# Altium PCB g1.PcbDoc (part 1 of 2)
Units mm, origin at the board's own origin, x right, y up, seen from the top; angles counter-clockwise.
Board outline 80 x 50 mm, 4 copper layers (Top Layer, Int1 (GND), Int2 (GND), Bottom Layer), stack 1.57 mm thick; 65 components, 42 nets, 263 pads, 236 vias.
Unrouted connection lines stored in the file: 74.
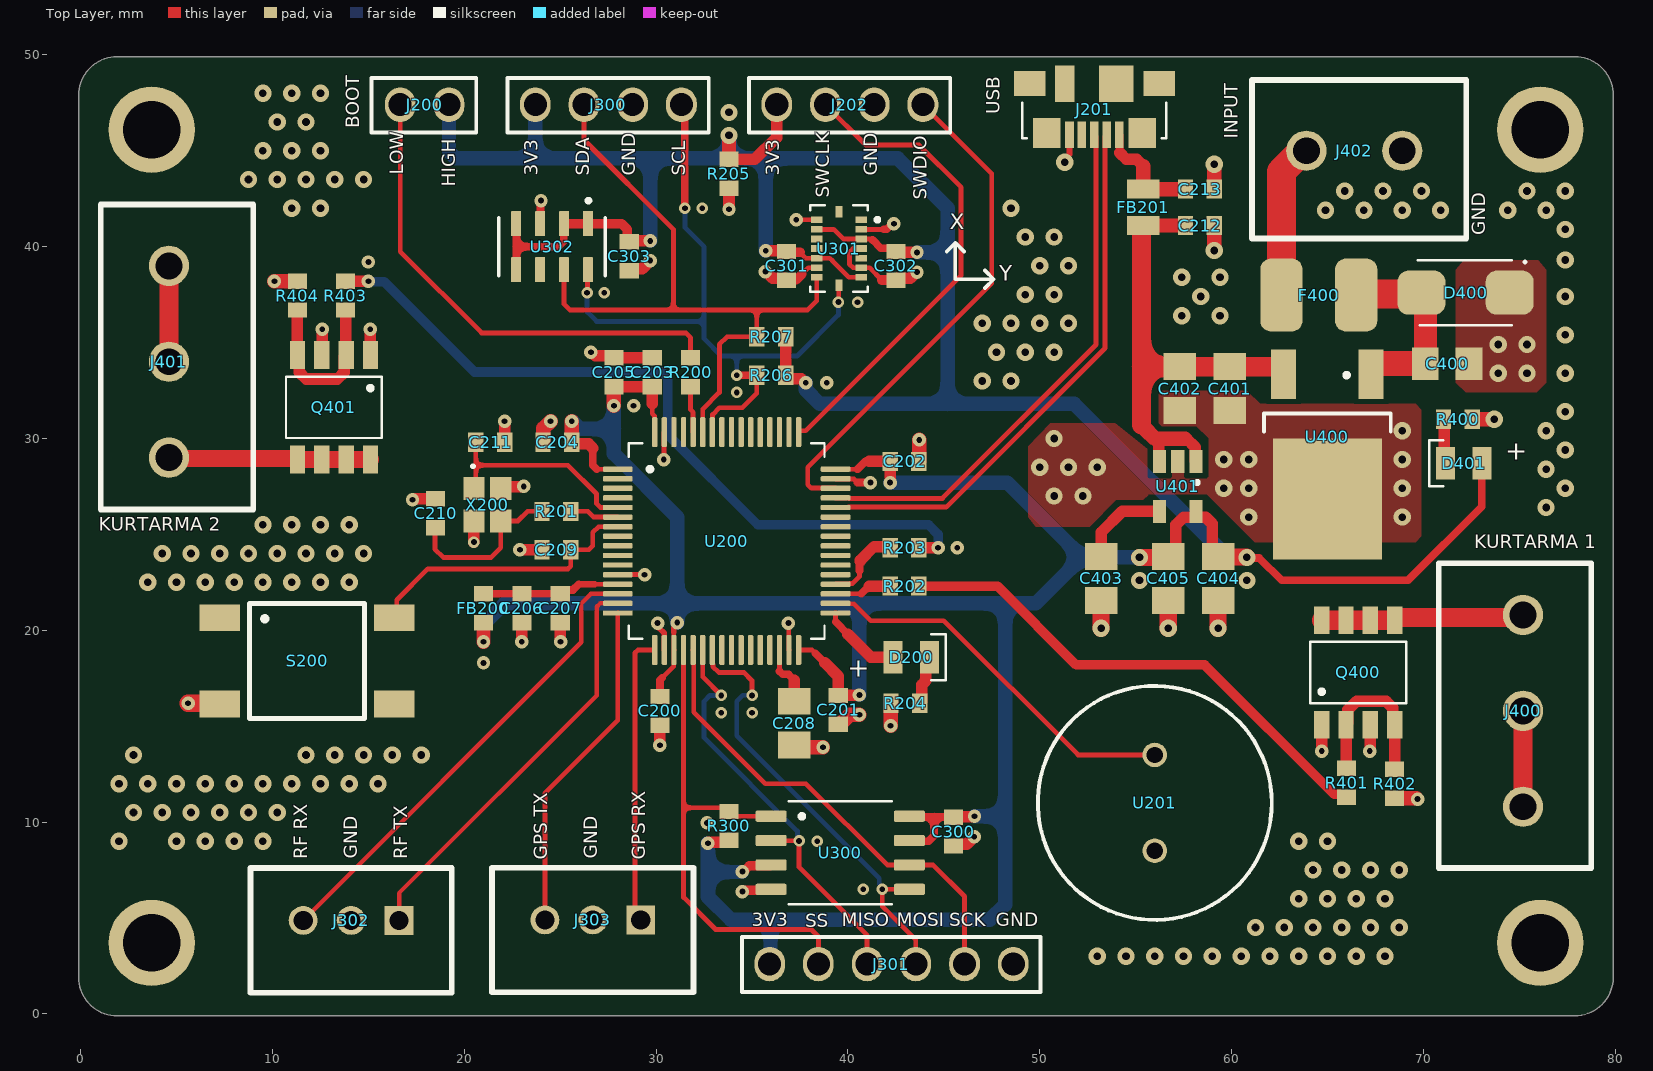
[diagram p0: Top Layer view]
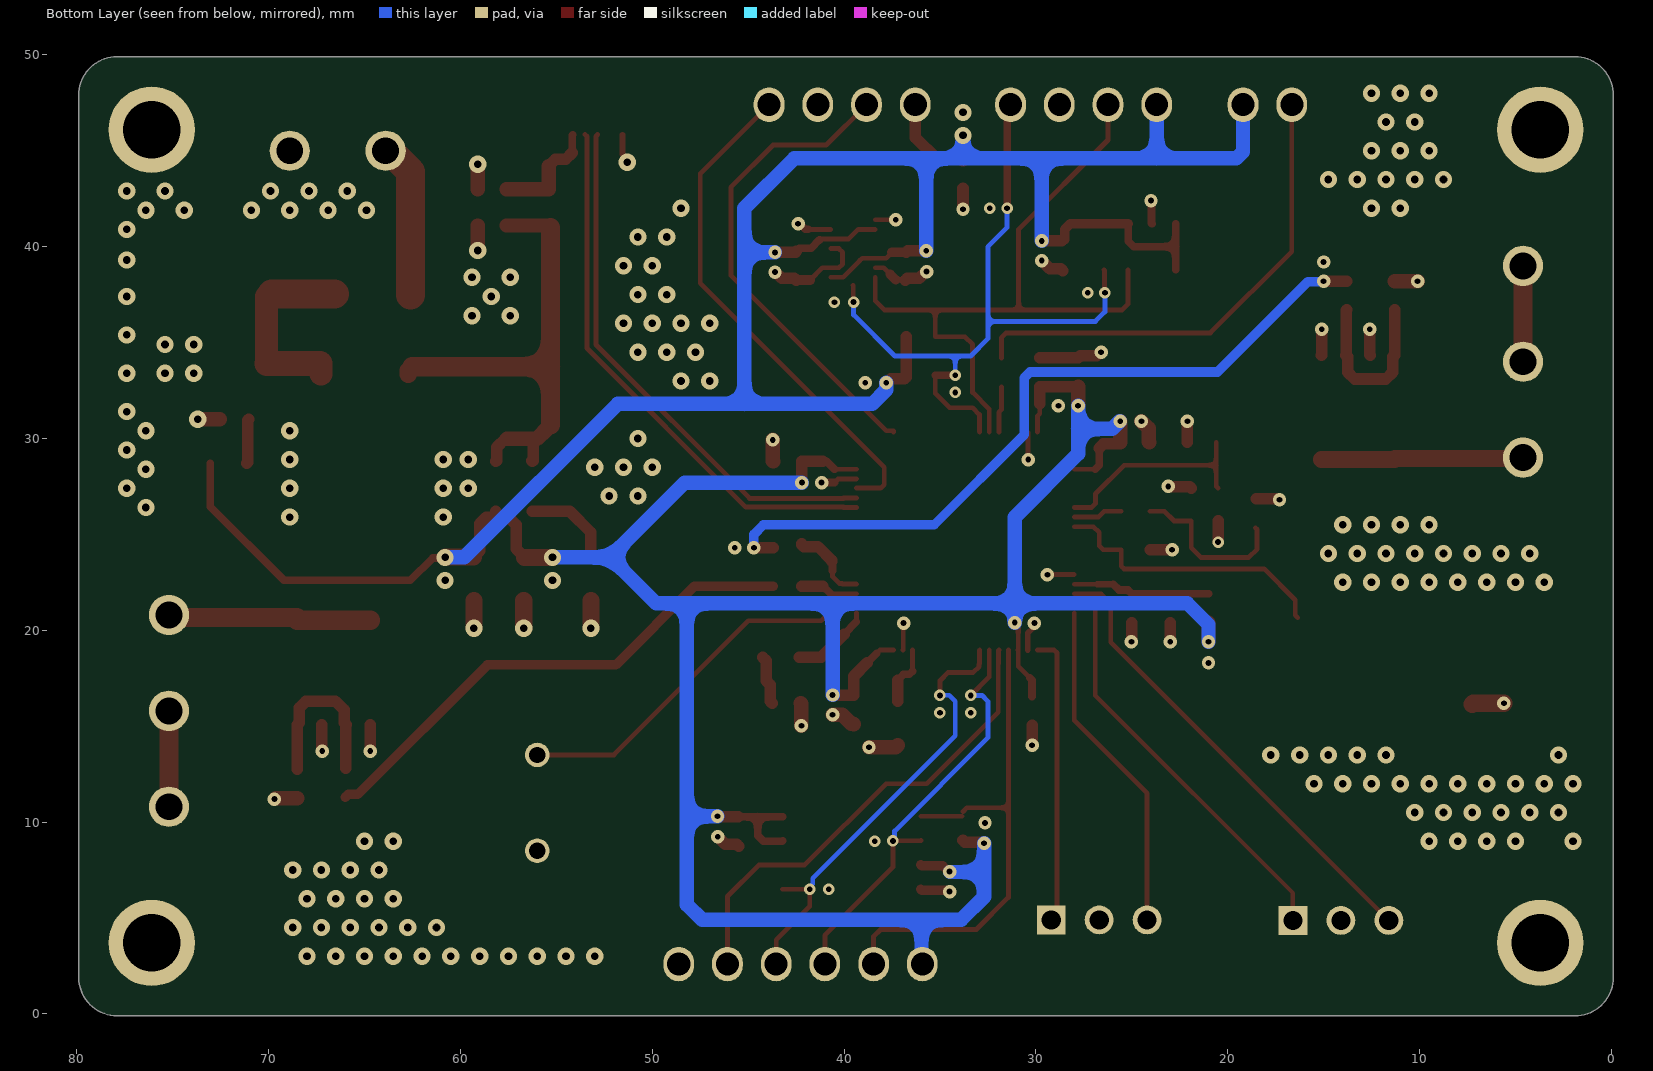
[diagram p1: Bottom Layer view, seen from below]
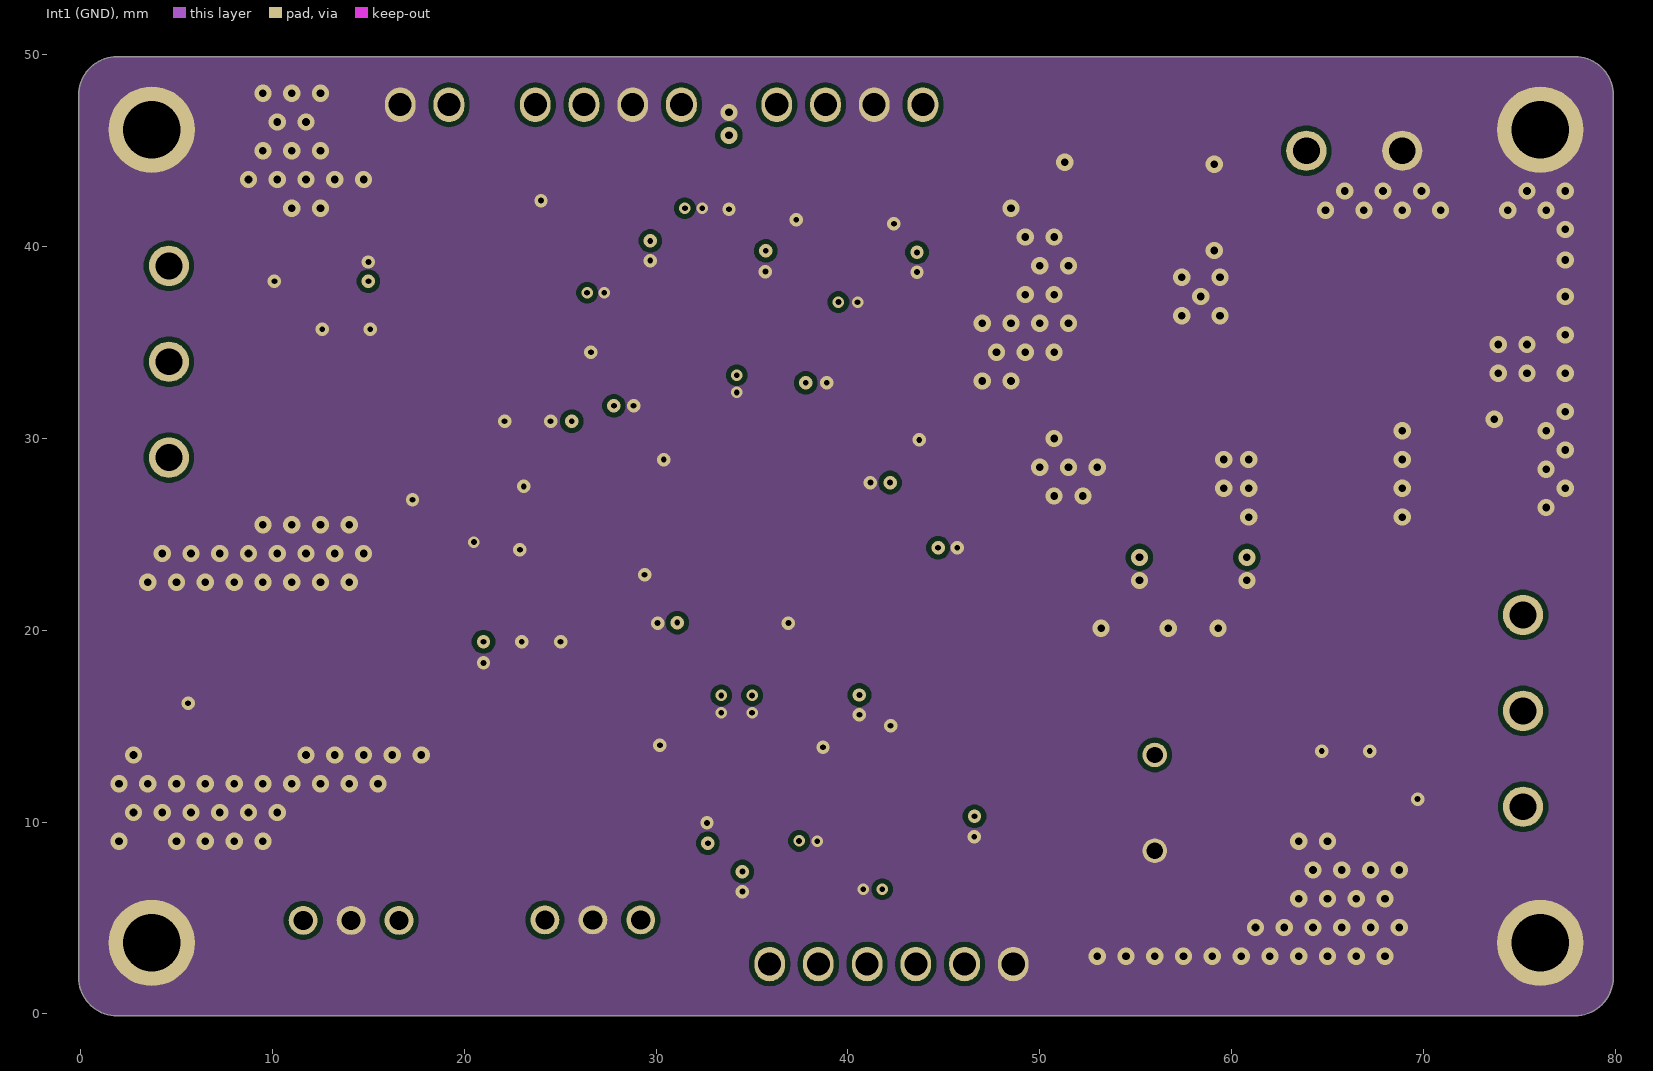
[diagram p2: Int1 (GND)]
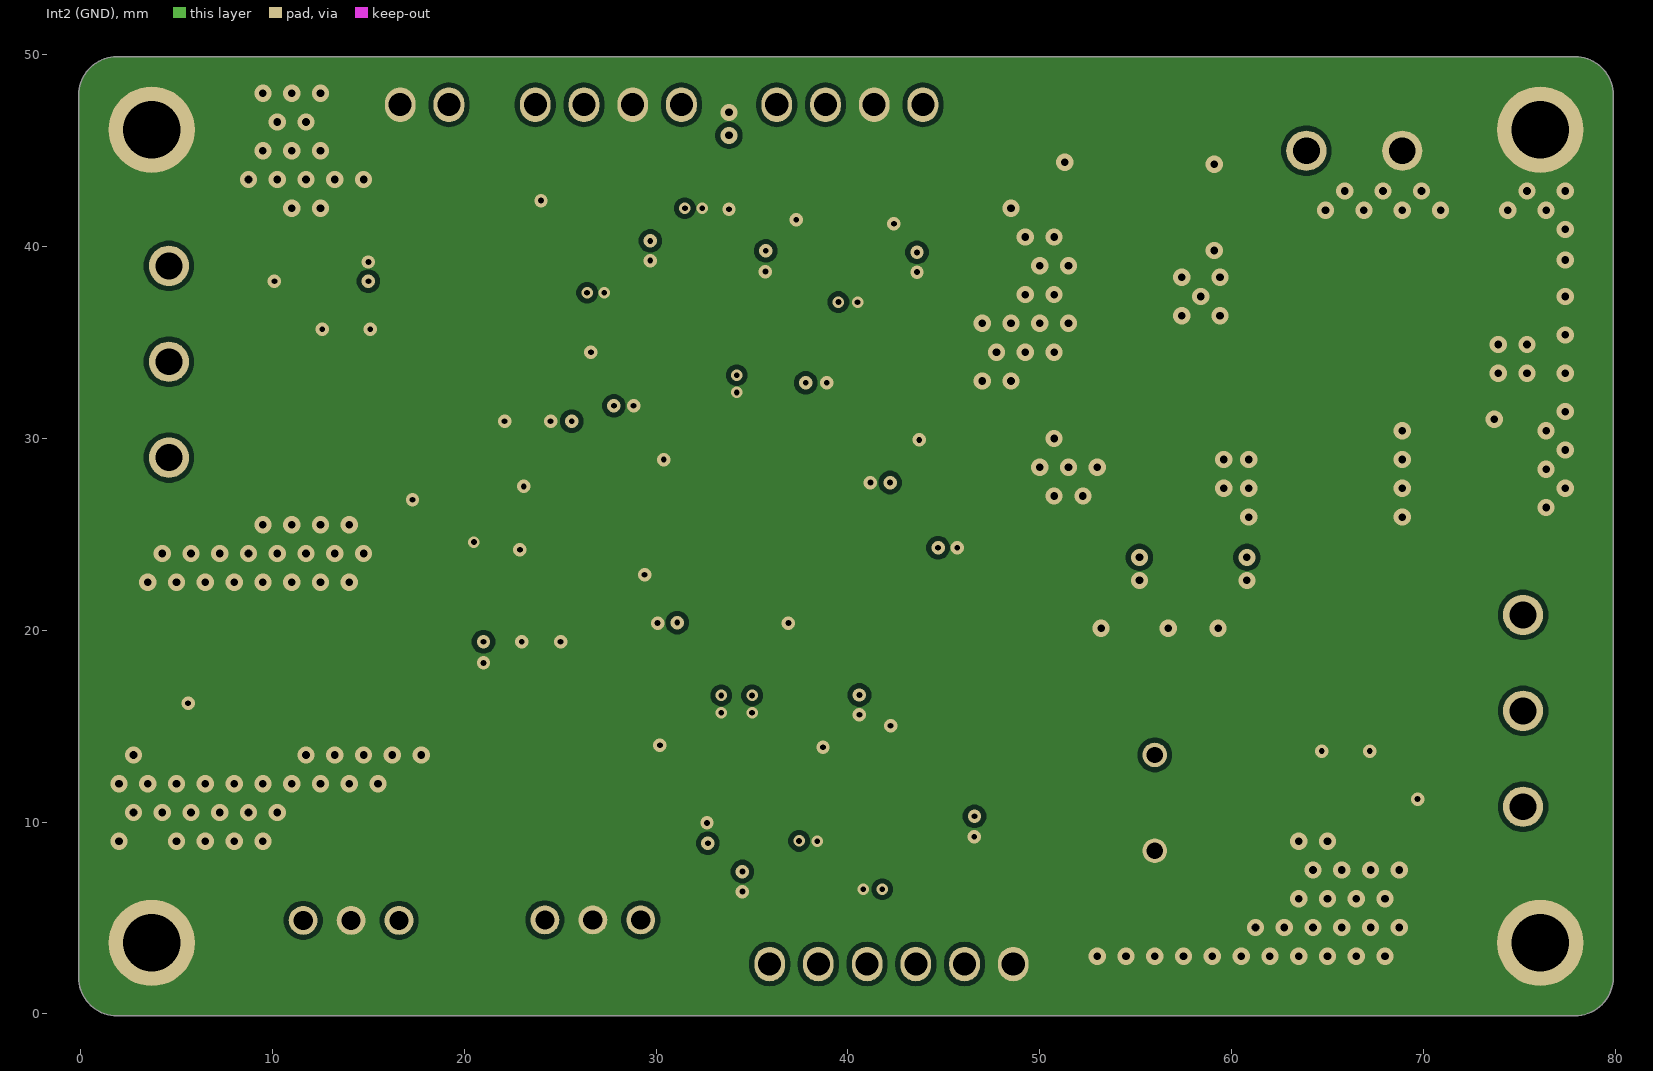
[diagram p3: Int2 (GND)]
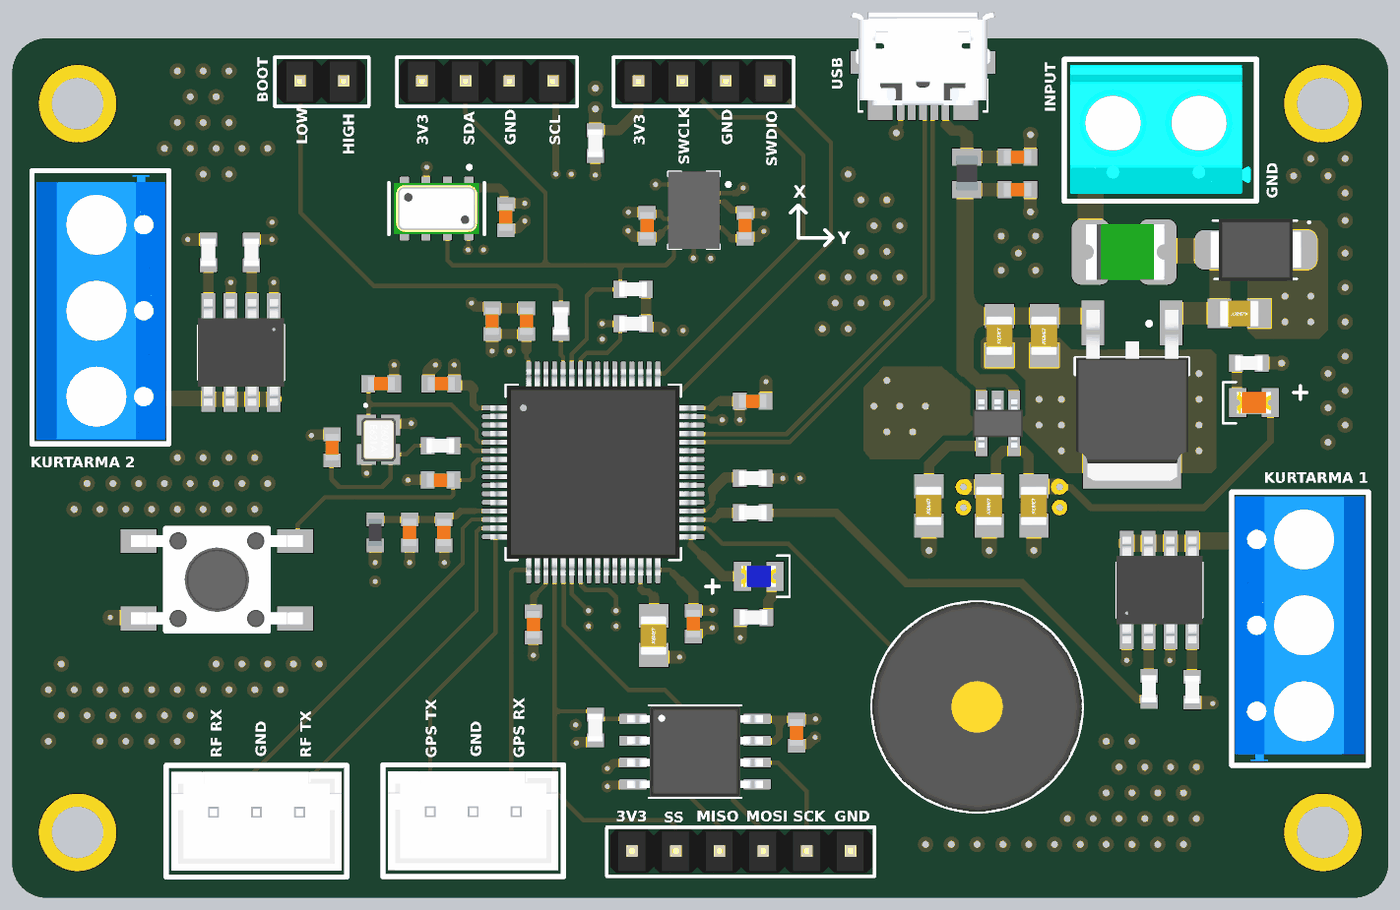
[diagram p4: 3D render of the assembled board from above, using the file's embedded part models]

## Layer stack, top to bottom
Top Solder: solder mask 0.0254, SM-001, Dk 4
Top Layer: signal copper 0.035
Dielectric 1: prepreg 0.2, PP-017, Dk 4.6
Int1 (GND): signal copper 0.0175
Dielectric 3: core 1.065, Core-039, Dk 4.6
Int2 (GND): signal copper 0.0175
Dielectric 5: prepreg 0.2, PP-017, Dk 4.6
Bottom Layer: signal copper 0.035
Bottom Solder: solder mask 0.0254, SM-001, Dk 4

## Board outline
-0.1,1.9 ccw(c1.9,1.9) 1.9,-0.1 77.9,-0.1 ccw(c77.9,1.9) 79.9,1.9 79.9,47.9 ccw(c77.9,47.9) 77.9,49.9 1.9,49.9 ccw(c1.9,47.9) -0.1,47.9

## Design rules (kind name [scope] priority, off if disabled: settings)
Clearance [All] p1: gap=0.254 ignorepadtopadclearanceinfootprint=FALSE except(0.1: SMDPad-SMDPad; 0.2: Arc-Arc Arc-Track Arc-SMDPad Arc-Hole Track-Track Track-SMDPad Track-Hole SMDPad-THPad SMDPad-Hole THPad-Hole Via-Hole Fill-Hole Poly-Hole Region-Hole Text-Hole; 0.3: Arc-Via Track-Via Via-Via; 0.33: Arc-THPad Track-THPad; 0.5: THPad-THPad)
DiffPairsRouting [All] p1: maxlimit=0.254 minlimit=0.203 mostfreqgap=0.254 toplayer_maxgap=0.203 toplayer_prefgap=0.203 toplayer_minwidth=0.26 toplayer_maxwidth=0.26 toplayer_prefwidth=0.26 midlayer1_minwidth=0.381 midlayer1_maxwidth=0.381 midlayer1_prefwidth=0.381 midlayer2_minwidth=0.381 midlayer2_maxwidth=0.381 midlayer2_prefwidth=0.381 bottomlayer_maxgap=0.203 bottomlayer_prefgap=0.203 bottomlayer_minwidth=0.26 bottomlayer_maxwidth=0.26 bottomlayer_prefwidth=0.26 maxuncoupledlength=12.7
HoleSize [All] p1: absolutevalues=TRUE maxlimit=6 minlimit=0.3 maxpercent=80.000 minpercent=20.000
HoleToHoleClearance [All] p1: gap=0.5 allowstackedmicrovias=TRUE
MinimumSolderMaskSliver [All] p1: minsoldermaskwidth=0.005
PlaneConnect [All] p1: planeconnectstyle=Direct reliefexpansion=0.508 reliefentries=4 reliefconductorwidth=0.254 reliefairgap=0.254
PolygonConnect [All] p1: connectstyle=Direct reliefconductorwidth=0.5 reliefentries=4 polygonreliefangle="90 Angle" airgapwidth=0
RoutingVias [All] p1: holewidth=0.3 width=0.7 viastyle="Through Hole" minholewidth=0.3 minwidth=0.5 maxholewidth=0.7 maxwidth=0.9
SilkToSilkClearance [All] p1: silktosilkclearance=0.2
SolderMaskExpansion [All] p1: expansion=0.05 istentingtop=FALSE
UnRoutedNet [All] p1: checkbadconnections=TRUE
Width [All] p1: maxlimit=1.5 minlimit=0.2 preferedwidth=0.3 minimp=50.000000 maximp=50.000000 favimp=50.000000
23 further rules are at their usual default settings.

## Classes and differential pairs
differential pair class DIFF_USB: USB_D
component class Power: C400 C401 C402 C403 C404 C405 D400 D401 F400 J400 J401 J402 Q400 Q401 R400 R401 R402 R403 R404 U400 U401
component class Peripheral: C300 C301 C302 C303 J300 J301 J302 J303 R300 U300 U301 U302
component class MCU: C200 C201 C202 C203 C204 C205 C206 C207 C208 C209 C210 C211 C212 C213 D200 FB200 FB201 J200 J201 J202 R5 R200 R201 R202 R203 R204 R205 R206 R207 S200 U200 U201 X200
differential pair USB_D: +USB_D_P -USB_D_N

## Components (designator, comment, footprint, x,y, rotation, side; value= is the part's Value field where it differs from the comment)
C200 "100n" "CAP 0603" 30.2,15.8 r90 top
C201 "100n" "CAP 0603" 39.5,15.85 r90 top
C202 "100n" "CAP 0603" 42.95,28.8 r180 top
C203 "100n" "CAP 0603" 29.8,33.45 r270 top
C204 "1u" "CAP 0603" 24.85,29.8 r0 top
C205 "2u2" "CAP 0603" 27.8,33.45 r270 top
C206 "100n" "CAP 0603" 23,21.15 r90 top
C207 "1u" "CAP 0603" 25,21.15 r90 top
C208 "4u7" "CAP 0805" 37.2,15.157 r90 top
C209 "100n" "CAP 0603" 24.8,24.2 r0 top
C210 "8p" "CAP 0603" 18.5,26.1 r270 top
C211 "8p" "CAP 0603" 21.35,29.8 r180 top
C212 "2u2" "CAP 0603" 58.35,41.1 r0 top
C213 "2u2" "CAP 0603" 58.35,43 r0 top
C300 "100n" "CAP 0603" 45.5,9.5 r270 top
C301 "100n" "CAP 0603" 36.8,39 r90 top
C302 "100n" "CAP 0603" 42.5,39 r90 top
C303 "100n" "CAP 0603" 28.6,39.5 r90 top
C400 "0u33" "CAP 0805" 71.243,33.9 r180 top
C401 "100n" "CAP 0805" 59.9,32.6 r90 top
C402 "100n" "CAP 0805" 57.3,32.6 r90 top
C403 "470p" "CAP 0805" 53.2,22.7 r90 top
C404 "4u7" "CAP 0805" 59.3,22.7 r90 top
C405 "100n" "CAP 0805" 56.7,22.7 r90 top
D200 "LED 0805 BLUE" "LED 0805 BLUE" 43.3,18.6 r180 top
D400 "SMBJ12CA-13-F" SMBJ12CA-13-F 72.2,37.6 r0 top
D401 "LED 0805 RED" "LED 0805 RED" 72.1,28.7 r0 top
F400 "0ZCG0075FF2C" 0ZCG0075FF2C 64.6,37.6 r0 top
FB200 "600 Ω @ 100 MHz" "FB 0603" 21,21.15 r90 top
FB201 "100R" "FB 0805" 55.4,42.05 r90 top
J200 "1x2 HEADER" "1x2 HEADER MALE" 16.66,47.4 r180 top
J201 "47346-0001" MOLEX_47346-0001 52.85,48.5 r180 top
J202 "1x4 HEADER MALE" "1X4 HEADER MALE" 40.1,47.4 r180 top
J300 "1x4 HEADER MALE" "1X4 HEADER MALE" 27.51,47.4 r180 top
J301 "1x6 HEADER MALE" "1X6 HEADER MALE" 42.27,2.6 r180 top
J302 "JST B3B-XH-A" JST_B3B-XH-A 14.1,4.35 r180 top
J303 "JST B3B-XH-A" JST_B3B-XH-A 26.7,4.375 r180 top
J400 "KF301 3P Terminal" "KF301 3P" 75.2,15.8 r270 top
J401 "KF301 3P Terminal" "KF301 3P" 4.6,34 r90 top
J402 "KF301 2P Terminal" "KF301 2P" 66.4,45 r0 top
Q400 "DMG4822SSD-13" DMG4822SSD-13 66.6,17.8 r90 top
Q401 "DMG4822SSD-13" DMG4822SSD-13 13.205,31.625 r270 top
R200 "10K" "RES 0603" 31.8,33.45 r270 top
R201 "0R" "RES 0603" 24.8,26.2 r0 top
R202 "1K" "RES 0603" 42.95,22.3 r180 top
R203 "1K" "RES 0603" 42.95,24.3 r0 top
R204 "1K" "RES 0603" 43,16.2 r180 top
R205 "10K" "RES 0603" 33.8,43.8 r90 top
R206 "10K" "RES 0603" 36,33.3 r0 top
R207 "10K" "RES 0603" 36,35.3 r0 top
R300 "10K" "RES 0603" 33.8,9.8 r270 top
R400 "1K" "RES 0603" 71.8,31 r0 top
R401 "1K" "RES 0603" 66,12.05 r90 top
R402 "10K" "RES 0603" 68.5,12 r90 top
R403 "1K" "RES 0603" 13.8,37.45 r270 top
R404 "10K" "RES 0603" 11.3,37.45 r270 top
S200 "FSM4JSMATR" FSM4JSMATR 11.8,18.4 r90 top
U200 "STM32F446RET6" STM32F446RET6 33.68,24.65 r0 top
U201 "PS1240P02BT" PS1240P02BT 56,11 r90 top
U300 "W25Q64JVSSIQ" W25Q64JVSSIQ 39.6,8.4 r0 top
U301 "BMI088" BMI088 39.535,39.9 r270 top
U302 "MS560702BA03-50" MS5607-02BA3 24.575,40 r270 top
U400 "L78M05CDT-TR" L78M05CDT-TR 65,29.2 r270 top
U401 "MIC5205-3.3YM5-TR" MIC5205-3.3YM5-TR 57.2,27.5 r180 top
X200 "FA-20H 16.0000MF10Z-AJ0" "FA-20H 16.0000MF10Z-AJ0" 21.3,26.55 r270 top

## Footprints (in the part's own frame and the unit in brackets; to place one, negate y for a bottom-side part, rotate by r counter-clockwise, add the part's x,y. Pads: shape width x height; smd on the part's side, far side on the other; paste and mask are expansions set on the pad)
0ZCG0075FF2C [mm] "PTC"
  rrect50% 2.2x3.8 smd: 1(-2,-0.125) 2(1.9,-0.125)
  body extent -2.26,-1.75 2.29,1.49, height 0.7
"1x2 HEADER MALE" [mm]
  oval 1.6x1.8 hole 1.2: 1(-2.54,0) 2(0,0)
  silkscreen extent -3.97,-1.4 1.5,1.45, body extent -3.76,-1.27 1.32,1.27, height 9.2
"1X4 HEADER MALE" [mm]
  oval 1.6x1.8 hole 1.2: 1(-3.81,0) 2(-1.27,0) 3(1.27,0) 4(3.81,0)
  silkscreen extent -5.23,-1.4 5.25,1.45, body extent -5.08,-1.27 5.08,1.27, height 9.2
"1X6 HEADER MALE" [mm]
  oval 1.6x1.8 hole 1.2: 1(-6.35,0) 2(-3.81,0) 3(-1.27,0) 4(1.27,0) 5(3.81,0) 6(6.35,0)
  silkscreen extent -7.77,-1.4 7.8,1.45, body extent -7.62,-1.27 7.62,1.27, height 9.2
BMI088 [mm]
  rect 0.35x0.59 smd: 1(-1.5,1.165) 2(-1,1.165) 3(-0.5,1.165) 4(0,1.165) 5(0.5,1.165) 6(1,1.165) 7(1.5,1.165) 9(1.5,-1.165) 10(1,-1.165) 11(0.5,-1.165) 12(0,-1.165) 13(-0.5,-1.165) 14(-1,-1.165) 15(-1.5,-1.165)
  rect 0.59x0.35 smd: 8(1.915,0) 16(-1.915,0)
  silkscreen extent -2.25,-1.5 2.25,2.1, body extent -2.25,-1.5 2.25,1.5, height 1.55
"CAP 0603" [mm]
  rect 0.8x1 smd: 1(-0.75,0) 2(0.75,0)
  body extent -0.8,-0.4 0.8,0.4, height 0.51
"CAP 0805" [mm]
  rect 1.4x1.7 smd: 1(-1.143,0) 2(1.143,0)
  body extent -1.15,-0.76 1.15,0.79, height 1.01
DMG4822SSD-13 [mm]
  rect 1.45x0.8 smd: 1(-2.725,1.905) 2(-2.725,0.635) 3(-2.725,-0.635) 4(-2.725,-1.905) 5(2.725,-1.905) 6(2.725,-0.635) 7(2.725,0.635) 8(2.725,1.905)
  silkscreen extent -1.6,-2.5 1.6,2.5, body extent -3.1,-2.5 3.1,2.5, height 1.7
"FA-20H 16.0000MF10Z-AJ0" [mm]
  rect 1.2x1.1 smd: 1(-0.85,-0.8) 2(0.85,-0.8) 3(0.85,0.6) 4(-0.85,0.6)
  silkscreen extent -2.05,-0.9 -1.95,-0.8, body extent -1.25,-1.1 1.25,0.9, height 0.63
"FB 0603" [mm]
  rect 0.8x1 smd: 1(-0.75,0) 2(0.75,0)
  body extent -0.8,-0.4 0.8,0.4, height 0.81
"FB 0805" [mm]
  rect 1x1.7 smd: 1(-0.95,0) 2(0.95,0)
  body extent -1,-0.63 1,0.63, height 0.86
FSM4JSMATR [mm]
  rect 1.4x2.1 smd: 1(2.25,4.55) 2(2.25,-4.55) 3(-2.25,4.55) 4(-2.25,-4.55)
  silkscreen extent -3,-3 3,3, body extent -3,-5 3,5, height 5.13
JST_B3B-XH-A [mm]
  rect 1.508x1.508 / inner round 1.508 / far side rect 1.508x1.508 hole 1: 1(-2.5,-0.525)
  round 1.508 hole 1: 2(0,-0.525) 3(2.5,-0.525)
  silkscreen extent -5.25,-3.25 5.25,3.25, body extent -4.95,-2.88 4.95,2.88, height 7
"KF301 2P" [mm] "2 Pin 5mm Terminal"
  round 2.1 hole 1.4: 1(-2.5,0) 2(2.5,0)
  silkscreen extent -5.33,-4.57 5.84,3.68, body extent -5,-4.13 5.5,3.37, height 10
"KF301 3P" [mm] "3 Pin 5mm Terminal"
  round 2.1 hole 1.4: 1(-5,0) 2(0,0) 3(5,0)
  silkscreen extent -7.7,-4.4 8.2,3.56, body extent -7.45,-4.19 7.95,3.31, height 10.01
L78M05CDT-TR [mm]
  rect 2.6x1.3 smd: 1(-4.15,2.28) 3(-4.15,-2.28)
  rect 6.3x5.7 smd: 2(2.35,0)
  silkscreen extent -4.2,-3.3 -1.15,3.3, body extent -4.89,-3.25 5.04,3.29, height 2.34
"LED 0805 BLUE" [mm]
  rect 1x1.7 smd: A(0.95,0) K(-0.95,0)
  silkscreen extent -1.8,-1.2 -1.05,1.2, body extent -1,-0.63 1,0.63, height 1.12
"LED 0805 RED" [mm]
  rect 1x1.7 smd: A(0.95,0) K(-0.95,0)
  silkscreen extent -1.8,-1.2 -1.05,1.2, body extent -1,-0.63 1,0.63, height 1.12
MIC5205-3.3YM5-TR [mm]
  rect 0.69x1.2 smd: 1(-0.95,-1.3) 2(0,-1.3) 3(0.95,-1.3) 4(0.95,1.3) 5(-0.95,1.3)
  silkscreen extent -1.09,-0.29 -0.91,-0.11, body extent -1.45,-1.4 1.45,1.4, height 1.45
MOLEX_47346-0001 [mm]
  rect 0.45x1.38 smd: 1(-1.3,2.66) 2(-0.65,2.66) 3(0,2.66) 4(0.65,2.66) 5(1.3,2.66)
  rect 1.425x1.55 smd: S1(-2.488,2.575) S2(2.488,2.575)
  rect 1.65x1.3 smd: S3(-3.375,0) S6(3.375,0)
  rect 1.8x1.9 smd: S4(-1.15,0)
  rect 1x1.9 smd: S5(1.55,0)
  silkscreen extent -3.75,1 3.75,2.85, body extent -4.18,-2.93 4.18,2.5, height 2.7
MS5607-02BA3 [mm]
  rrect15% 1.31x0.53 smd: 1(-1.2,1.875)
  rrect16% 1.31x0.53 smd: 2(-1.2,0.625) 3(-1.2,-0.625) 4(-1.2,-1.875) 5(1.2,-1.875) 6(1.2,-0.625) 7(1.2,0.625) 8(1.2,1.875)
  silkscreen extent -2.5,-2.78 1.5,2.78, body extent -1.5,-2.5 1.5,2.5, height 1.1
PS1240P02BT [mm] "Buzzer"
  round 1.28 hole 0.85: 1(-2.5,0) 2(2.5,0)
  silkscreen extent -6.1,-6.1 6.1,6.1, body extent -6.1,-6.1 6.1,6.1, height 6.7
"RES 0603" [mm]
  rect 0.8x1 smd: 1(-0.75,0) 2(0.75,0)
  body extent -0.8,-0.43 0.8,0.43, height 0.52
SMBJ12CA-13-F [mm]
  rrect50% 2.5x2.3 smd: 1(2.3,0) 2(-2.3,0)
  silkscreen extent -2.5,-1.7 3.15,1.7, body extent -2.65,-1.81 2.65,1.81, height 2.5
STM32F446RET6 [mm]
  rrect50% 1.56x0.28 smd: 1(-5.68,3.75) 2(-5.68,3.25) 3(-5.68,2.75) 4(-5.68,2.25) 5(-5.68,1.75) 6(-5.68,1.25) 7(-5.68,0.75) 8(-5.68,0.25) 9(-5.68,-0.25) 10(-5.68,-0.75) 11(-5.68,-1.25) 12(-5.68,-1.75) 13(-5.68,-2.25) 14(-5.68,-2.75) 15(-5.68,-3.25) 16(-5.68,-3.75) 33(5.68,-3.75) 34(5.68,-3.25) 35(5.68,-2.75) 36(5.68,-2.25) 37(5.68,-1.75) 38(5.68,-1.25) 39(5.68,-0.75) 40(5.68,-0.25) 41(5.68,0.25) 42(5.68,0.75) 43(5.68,1.25) 44(5.68,1.75) 45(5.68,2.25) 46(5.68,2.75) 47(5.68,3.25) 48(5.68,3.75)
  rrect50% 0.28x1.56 smd: 17(-3.75,-5.68) 18(-3.25,-5.68) 19(-2.75,-5.68) 20(-2.25,-5.68) 21(-1.75,-5.68) 22(-1.25,-5.68) 23(-0.75,-5.68) 24(-0.25,-5.68) 25(0.25,-5.68) 26(0.75,-5.68) 27(1.25,-5.68) 28(1.75,-5.68) 29(2.25,-5.68) 30(2.75,-5.68) 31(3.25,-5.68) 32(3.75,-5.68) 49(3.75,5.68) 50(3.25,5.68) 51(2.75,5.68) 52(2.25,5.68) 53(1.75,5.68) 54(1.25,5.68) 55(0.75,5.68) 56(0.25,5.68) 57(-0.25,5.68) 58(-0.75,5.68) 59(-1.25,5.68) 60(-1.75,5.68) 61(-2.25,5.68) 62(-2.75,5.68) 63(-3.25,5.68) 64(-3.75,5.68)
  silkscreen extent -5.1,-5.1 5.1,5.1, body extent -6,-6 6,6, height 1.6
W25Q64JVSSIQ [mm] "SPI Flash Memory"
  rrect25% 1.61x0.58 smd: 1(-3.605,1.905) 2(-3.605,0.635) 3(-3.605,-0.635) 4(-3.605,-1.905) 5(3.605,-1.905) 6(3.605,-0.635) 7(3.605,0.635) 8(3.605,1.905)
  silkscreen extent -2.69,-2.69 2.69,2.69, body extent -3.95,-2.64 3.95,2.64, height 2.16

## Part data
C200 C201 C202 C203 C205 C206 C207 C209 C210 C211 C212 C213 C300 C301 C302 C303: library part "CAP 0603 50V", "Capacitor SMD 0603 50V"
C204: library part "CAP 0603 16V", "Capacitor SMD 0603 16V"
C208: library part "CAP 0805 25V", "Capacitor SMD 0805 25V"
C400 C401 C402 C403 C404 C405: library part "CAP 0805 50V", "Capacitor SMD 0805 50V"
D200: "LED 0805 GREEN SMD"
D400: "TVS DIODE 12VWM 19.9VC SMB", Breakdown Voltage=15.3V, Capacitance=340pF, Case/Package=SMB, Clamping Voltage=19.9V, Leakage Current=5uA, Manufacturer=Diodes, Max Operating Temperature=150°C, Max Output Current=30.2A, Max Power Dissipation=600W, Min Breakdown Voltage=13.3V, Min Operating Temperature=-55°C, Package Body Material=Plastic, Package Quantity=3000, Package Shape=Rectangular, Peak Reflow Temperature (Cel)=245°C, Power Line Protection=No, Reverse Standoff Voltage=12V, Test Current=1mA, Time @ Peak Reflow Temperature-Max (s)=5s, Category="TVS Diodes", Clamping Voltage-Max=19.9V, ComponentLink1Description=https://datasheet.ciiva.com/34302/1542303-34302437.pdf?src-supplier=Jameco, ComponentLink1URL=https://datasheet.ciiva.com/34302/1542303-34302437.pdf?src-supplier=Jameco, Diode Element Material=SILICON, Diode Type=ZENER, Direction=Bidirectional, Height=2.62mm, JESD-30 Code=R-PDSO-C2, Lead Free="Contains Lead", Length=4.57mm, Manufacturer Part Number=SMBJ12CA-13-F, Max Breakdown Voltage=15.3V, Max Reverse Leakage Current=5uA, Max Surge Current=30.2A, Moisture Sensitivity Level=1, Mount="Surface Mount", Number of Bidirectional Channels=1, Number of Elements=1, Number of Pins=2, Packaging="Tape and Reel", Peak Pulse Current=30.2A, Peak Pulse Power=600W, Polarity=Bidirectional, Power Dissipation=600W, Pricing 1="3000=0,104, 9000=0,0995, 12000=0,0985, 30000=0,0953, 45000=0,0922 (USD)", Radiation Hardening=No, Reverse Breakdown Voltage=13.3V, RoHS=Yes, RoHS Compliant=Yes, Series=SMBJ, Stock 1=27000, Supplier 1="Future Electronics", Surface Mount=Yes, Technology=AVALANCHE, Terminal Finish=Tin, Terminal Form="C BEND", Terminal Position=DUAL, Termination=SMD/SMT, Voltage Rating (DC)=12V, Width=3.9mm, Working Voltage=12V
D401: "LED 0805 RED SMD"
F400: "PTC Resettable Fuse 0.75A(hold) 1.5A(trip) 16VDC 100A 0.8W 0.2s 0.11Ohm SMD Solder Pad 1812 4.73 X 3.41 X 0.65mm T/R...", Case Code (Metric)=4532, Case Code (Imperial)=1812, Hold Current=750mA, Manufacturer=Bel, Max Current Rating=100A, Max Operating Temperature=85°C, Min Operating Temperature=-40°C, Trip Current=1.5A, Case/Package=1812, Category="PTC Resettable Fuses", ComponentLink1Description=https://datasheet.ciiva.com/18550/0zcg-18550523.pdf?src-supplier=Digi-Key, ComponentLink1URL=https://datasheet.ciiva.com/18550/0zcg-18550523.pdf?src-supplier=Digi-Key, ComponentLink2Description=https://datasheet.ciiva.com/18550/0zcg-18550524.pdf?src-supplier=Digi-Key, ComponentLink2URL=https://datasheet.ciiva.com/18550/0zcg-18550524.pdf?src-supplier=Digi-Key, ComponentLink3Description=https://datasheet.ciiva.com/18550/0zcg-18550767.pdf?src-supplier=Digi-Key, ComponentLink3URL=https://datasheet.ciiva.com/18550/0zcg-18550767.pdf?src-supplier=Digi-Key, Contact Plating=Tin,Matte, Lead Free="Lead Free", Manufacturer Part Number=0ZCG0075FF2C, Mount="Surface Mount", Packaging="Cut Tape", Pricing 1="2000=0,0751, 4000=0,0699, 6000=0,065, 10000=0,0604 (USD)", RoHS=Yes, RoHS Compliant=Yes, Series=0ZCG, Stock 1=4661, Supplier 1="Arrow Electronics", Time to Trip=200ms
FB200: library part "FB 0603", "Ferrite Bead SMD 0603"
FB201: library part "FB 0805", "Ferrite Bead SMD 0805"
J201: "Micro-USB B Receptacle with Flange, Bottom Mount, Surface Mount, Lead-Free", Color=Black, Contact Current Rating=1A, Contact Resistance=40mR, Current Rating=1.8A, Flammability Rating="UL94 V-0", Manufacturer=Molex, Max Operating Temperature=85°C, Max Voltage Rating (AC)=30V, Min Operating Temperature=-20°C, Category="Headers and Wire Housings", ComponentLink1Description=https://datasheet.ciiva.com/30075/304740473460001-io-nectors-30075527.pdf?src-supplier=Onlinecomponents.com, ComponentLink1URL=https://datasheet.ciiva.com/30075/304740473460001-io-nectors-30075527.pdf?src-supplier=Onlinecomponents.com, ComponentLink2Description=https://datasheet.ciiva.com/22654/1630785-22654942.pdf?src-supplier=Element14, ComponentLink2URL=https://datasheet.ciiva.com/22654/1630785-22654942.pdf?src-supplier=Element14, ComponentLink3Description=https://datasheet.ciiva.com/16148/1700180473460001-io-nectors-16148917.pdf?src-supplier=Onlinecomponents.com, ComponentLink3URL=https://datasheet.ciiva.com/16148/1700180473460001-io-nectors-16148917.pdf?src-supplier=Onlinecomponents.com, ComponentLink4Description=https://datasheet.ciiva.com/16986/70266948-16986683.pdf?src-supplier=Allied+Electronics, ComponentLink4URL=https://datasheet.ciiva.com/16986/70266948-16986683.pdf?src-supplier=Allied+Electronics, ComponentLink5Description=https://datasheet.ciiva.com/28504/0473460001-io-connectors-28504587.pdf?src-supplier=Element14, ComponentLink5URL=https://datasheet.ciiva.com/28504/0473460001-io-connectors-28504587.pdf?src-supplier=Element14, ComponentLink6Description=https://datasheet.ciiva.com/46390/1681853-46390956.pdf?src-supplier=Element14, ComponentLink6URL=https://datasheet.ciiva.com/46390/1681853-46390956.pdf?src-supplier=Element14, Connector Type=USB,Receptacle, Contact Material="Copper Alloy,Copper", Contact Plating=Gold, Gender=Female, Glow Wire Compliant=Non-compliant, Halogen Free="Low Halogen", Housing Material=Polymer, Lead Free="Lead Free", Manufacturer Part Number=47346-0001, Mount="Surface Mount", Number of Circuits=5, Number of Contacts=5, Number of Ports=1, Number of Positions=5, Number of Rows=1, Orientation="Right Angle", Packaging="Tape and Reel", Pitch=0.65mm, Pricing 1="14000=0,5225 (USD)", Reach SVHC Compliant=Unknown, RoHS=Yes, RoHS Compliant=Yes, Series=47346, Stock 1=14156, Supplier 1="Sager Electronics", Termination=SMD/SMT, USB Standard="USB 2.0", Voltage Rating=30V, Voltage Rating (AC)=30V
J302 J303: "Connector Header, XH Series, 3 Position, 2.50mm, Through Hole, Press-Fit, Solder, Natural", Manufacturer=JST, Manufacturer Part Number=B3B-XH-A(LF)(SN), Category="Headers and Wire Housings", ComponentLink1Description=https://datasheet.ciiva.com/26894/getdatasheetpartid-640434-26894454.pdf?src-supplier=Verical, ComponentLink1URL=https://datasheet.ciiva.com/26894/getdatasheetpartid-640434-26894454.pdf?src-supplier=Verical, ComponentLink2Description=https://datasheet.ciiva.com/26894/getdatasheetpartid-440399-26894778.pdf?src-supplier=Verical, ComponentLink2URL=https://datasheet.ciiva.com/26894/getdatasheetpartid-440399-26894778.pdf?src-supplier=Verical, ComponentLink3Description=https://datasheet.ciiva.com/11746/0900766b8082653f-11746520.pdf?src-supplier=Rs, ComponentLink3URL=https://datasheet.ciiva.com/11746/0900766b8082653f-11746520.pdf?src-supplier=Rs, Pricing 1="1=39,94, 10=25,1, 50=21,68, 100=18,25, 500=17,57, 1000=17,12, 2000=16,44, 4000=15,79 (JPY)", RoHS=Yes, Stock 1=2101, Supplier 1=CoreStaff
J400 J401: "3 Pin Screw Terminal Block 5mm"
J402: "2 Pin Screw Terminal Block 5mm"
Q400 Q401: "Dual N-Channel 30 V 1.42 W 10.5 nC Enhancement Mode Mosfet - SOIC-8", Case/Package=SOIC, Continuous Drain Current (ID)=10A, Drain to Source Resistance=20mR, Drain to Source Voltage (Vdss)=30V, Gate to Source Voltage (Vgs)=25V, Manufacturer=Diodes, Max Operating Temperature=150°C, Max Power Dissipation=1.42W, Min Operating Temperature=-55°C, Package Quantity=2500, Input Capacitance=478.9pF, Category=MOSFETs, ComponentLink1Description=https://datasheet.ciiva.com/4443/dmg4822ssd-10758-4443079.pdf?src-supplier=Mouser, ComponentLink1URL=https://datasheet.ciiva.com/4443/dmg4822ssd-10758-4443079.pdf?src-supplier=Mouser, ComponentLink2Description=https://datasheet.ciiva.com/6386/dmg4822ssd-6386688.pdf?src-supplier=Digi-Key, ComponentLink2URL=https://datasheet.ciiva.com/6386/dmg4822ssd-6386688.pdf?src-supplier=Digi-Key, ComponentLink3Description=https://datasheet.ciiva.com/11174/dmg4822ssd-11174891.pdf?src-supplier=Avnet, ComponentLink3URL=https://datasheet.ciiva.com/11174/dmg4822ssd-11174891.pdf?src-supplier=Avnet, Fall Time=3.1ns, FET Type="2 N-Channel", Height=1.5mm, Lead Free="Lead Free", Length=4.95mm, Manufacturer Part Number=DMG4822SSD-13, Mount="Surface Mount", Number of Channels=2, Number of Pins=8, Packaging="Tape and Reel", Polarity=N-CHANNEL, Pricing 1="1=0,5556, 10=0,4998, 25=0,4948, 100=0,3987, 250=0,3947, 500=0,3232, 1000=0,265 (USD)", Radiation Hardening=No, Rds On Max=20mR, Reach SVHC Compliant=Yes, Rise Time=7.9ns, RoHS=Yes, RoHS Compliant=Yes, Series=-, Stock 1=2374, Supplier 1="Arrow Electronics", Turn-Off Delay Time=14.6ns, Turn-On Delay Time=2.9ns, Weight=0.00261oz, Width=3.95mm
R200 R201 R202 R203 R204 R205 R206 R207 R300 R400 R401 R402 R403 R404: library part "RES 0603", "Resistor SMD 0603"
S200: "Switch Tactile OFF (ON) SPST Round Button Gull Wing 0.05A 24VDC 1.57N SMD T/R", Manufacturer="TE Connectivity Alcoswitch", Category="Pushbutton Switches", ComponentLink1Description=https://datasheet.ciiva.com/16320/eng-cs-1308111-1-switches-core-program-catalog-0308-16320065.pdf?src-supplier=Future+Electronics, ComponentLink1URL=https://datasheet.ciiva.com/16320/eng-cs-1308111-1-switches-core-program-catalog-0308-16320065.pdf?src-supplier=Future+Electronics, ComponentLink2Description=https://datasheet.ciiva.com/1530/1683375-1530944.pdf?src-supplier=Element14, ComponentLink2URL=https://datasheet.ciiva.com/1530/1683375-1530944.pdf?src-supplier=Element14, ComponentLink3Description=https://datasheet.ciiva.com/23765/1486934-23765878.pdf?src-supplier=Newark, ComponentLink3URL=https://datasheet.ciiva.com/23765/1486934-23765878.pdf?src-supplier=Newark, ComponentLink4Description=https://datasheet.ciiva.com/7638/921681-7638037.pdf?src-supplier=Element14, ComponentLink4URL=https://datasheet.ciiva.com/7638/921681-7638037.pdf?src-supplier=Element14, Manufacturer Part Number=FSM4JSMATR, Pricing 1="1=0,36, 10=0,351, 25=0,33, 100=0,2866, 250=0,26, 500=0,24188 (USD)", RoHS=Yes, Stock 1=84996, Supplier 1=Digi-Key
U200: "ARM® Cortex®-M4 STM32 F4 Microcontroller IC 32-Bit 180MHz 512KB (512K x 8) FLASH 64-LQFP (10x10)", Manufacturer=STMicroelectronics, Category=Microcontrollers, ComponentLink1Description=http://www.mouser.com/ds/2/389/stm32f446mc-956216.pdf?src-supplier=Mouser, ComponentLink1URL=http://www.mouser.com/ds/2/389/stm32f446mc-956216.pdf?src-supplier=Mouser, ComponentLink2Description=http://www.farnell.com/datasheets/2309063.pdf?src-supplier=Farnell, ComponentLink2URL=http://www.farnell.com/datasheets/2309063.pdf?src-supplier=Farnell, ComponentLink3Description=https://datasheet.octopart.com/STM32F446RET6-STMicroelectronics-datasheet-58295083.pdf?src-supplier=Future+Electronics, ComponentLink3URL=https://datasheet.octopart.com/STM32F446RET6-STMicroelectronics-datasheet-58295083.pdf?src-supplier=Future+Electronics, ComponentLink4Description=http://www.st.com/content/ccc/resource/technical/document/datasheet/65/cb/75/50/53/d6/48/24/DM00141306.pdf/files/DM00141306.pdf/jcr:content/translations/en.DM00141306.pdf?src-supplier=Digi-Key, ComponentLink4URL=http://www.st.com/content/ccc/resource/technical/document/datasheet/65/cb/75/50/53/d6/48/24/DM00141306.pdf/files/DM00141306.pdf/jcr:content/translations/en.DM00141306.pdf?src-supplier=Digi-Key, ComponentLink5Description=http://www.farnell.com/datasheets/2309063.pdf?src-supplier=Element14, ComponentLink5URL=http://www.farnell.com/datasheets/2309063.pdf?src-supplier=Element14, ComponentLink6Description=https://datasheet.octopart.com/STM32F446RET6-STMicroelectronics-datasheet-41797127.pdf?src-supplier=Element14, ComponentLink6URL=https://datasheet.octopart.com/STM32F446RET6-STMicroelectronics-datasheet-41797127.pdf?src-supplier=Element14, ComponentLink7Description=http://www.farnell.com/datasheets/2309063.pdf?src-supplier=Newark, ComponentLink7URL=http://www.farnell.com/datasheets/2309063.pdf?src-supplier=Newark, ComponentLink8Description=https://datasheet.octopart.com/STM32F446RET6-STMicroelectronics-datasheet-83961502.pdf?src-supplier=SHENGYU+ELECTRONICS, ComponentLink8URL=https://datasheet.octopart.com/STM32F446RET6-STMicroelectronics-datasheet-83961502.pdf?src-supplier=SHENGYU+ELECTRONICS, Manufacturer Part Number=STM32F446RET6, Pricing 1="1=12,45, 10=11,25, 50=10,54, 100=9,5, 1000=6,72, 10000=6,72 (USD)", RoHS=Yes, Stock 1=2954, Supplier 1=Mouser
U201: "Audio Buzzer Piezo 30Vo-p 3Vo-p 70dBA Through Hole Pin Ammo", Manufacturer=TDK, Category="Audio Products", ComponentLink1Description=https://datasheet.ciiva.com/0/ef532-ps-112.pdf?src-supplier=Digi-Key, ComponentLink1URL=https://datasheet.ciiva.com/0/ef532-ps-112.pdf?src-supplier=Digi-Key, ComponentLink2Description=https://datasheet.ciiva.com/0/ef532-ps-111.pdf?src-supplier=Digi-Key, ComponentLink2URL=https://datasheet.ciiva.com/0/ef532-ps-111.pdf?src-supplier=Digi-Key, ComponentLink3Description=https://datasheet.ciiva.com/3306/ef532-ps-3306958.pdf?src-supplier=Avnet, ComponentLink3URL=https://datasheet.ciiva.com/3306/ef532-ps-3306958.pdf?src-supplier=Avnet, ComponentLink4Description=https://datasheet.ciiva.com/16225/ef532-ps-16225062.pdf?src-supplier=Onlinecomponents.com, ComponentLink4URL=https://datasheet.ciiva.com/16225/ef532-ps-16225062.pdf?src-supplier=Onlinecomponents.com, Manufacturer Part Number=PS1240P02BT, Pricing 1="1=156, 10=90, 50=60, 100=45, 500=39, 1000=34,5, 2000=30, 4000=29,1 (JPY)", RoHS=Yes, Stock 1=34, Supplier 1=CoreStaff
U300: "IC FLASH 64MBIT 104MHZ 8SOIC", Case/Package=SOIC, Frequency=133MHz, Manufacturer=Winbond, Max Operating Temperature=85°C, Min Operating Temperature=-40°C, Category=Flash, ComponentLink1Description=http://www.winbond.com/resource-files/w25q64jv%20revj%2003272018%20plus.pdf?src-supplier=Digi-Key, ComponentLink1URL=http://www.winbond.com/resource-files/w25q64jv%20revj%2003272018%20plus.pdf?src-supplier=Digi-Key, Manufacturer Part Number=W25Q64JVSSIQ, Memory Size=64Mb, Memory Type=Non-Volatile,FLASH, Mount="Surface Mount", Number of Pins=8, Packaging=Rail/Tube, Pricing 1="1=1,03, 25=0,9212, 100=0,8173, 500=0,7987, 5000=0,72112 (USD)", RoHS=Yes, RoHS Compliant=Yes, Series=SpiFlash®, Stock 1=138661, Supplier 1=Digi-Key
U301: "BMI088 Series 3.6 V 6 Axis Digital Output Accelerometer Motion Sensor - LGA-16", Manufacturer="Bosch Tools", Category="Inertial Measurement Units (IMUs)", ComponentLink1Description=https://ae-bst.resource.bosch.com/media/_tech/media/product_flyer/Bosch_Sensortec_Product_flyer_BMI088.pdf?src-supplier=Digi-Key, ComponentLink1URL=https://ae-bst.resource.bosch.com/media/_tech/media/product_flyer/Bosch_Sensortec_Product_flyer_BMI088.pdf?src-supplier=Digi-Key, ComponentLink2Description=https://ae-bst.resource.bosch.com/media/_tech/media/application_notes/BST-MIS-HS001.pdf?src-supplier=Digi-Key, ComponentLink2URL=https://ae-bst.resource.bosch.com/media/_tech/media/application_notes/BST-MIS-HS001.pdf?src-supplier=Digi-Key, Manufacturer Part Number=BMI088, Pricing 1="1=3,4884, 10=3,3155, 25=3,2816, 50=3,2477, 100=3,2147, 500=3,1828 (USD)", RoHS=No, Stock 1=2228, Supplier 1="Arrow Electronics"
U302: "Board Mount Pressure Sensor 0.01bar to 1.2bar Absolute 8-Pin QFN T/R", Case/Package=QFN, Manufacturer="Measurement Specialties", Max Operating Temperature=85°C, Max Supply Voltage=3.6V, Min Operating Temperature=-40°C, Min Supply Voltage=1.8V, Supply Current=12.5uA, Category="Pressure Sensors", ComponentLink1Description=https://datasheet.ciiva.com/28418/1756127-28418369.pdf?src-supplier=Element14, ComponentLink1URL=https://datasheet.ciiva.com/28418/1756127-28418369.pdf?src-supplier=Element14, ComponentLink2Description=https://datasheet.ciiva.com/45422/ms5607-02ba03-45422949.pdf?src-supplier=Digi-Key, ComponentLink2URL=https://datasheet.ciiva.com/45422/ms5607-02ba03-45422949.pdf?src-supplier=Digi-Key, ComponentLink3Description=https://datasheet.ciiva.com/45422/ms5607-02ba03-45422950.pdf?src-supplier=Digi-Key, ComponentLink3URL=https://datasheet.ciiva.com/45422/ms5607-02ba03-45422950.pdf?src-supplier=Digi-Key, ComponentLink4Description=https://datasheet.ciiva.com/45422/ms5607-02ba03-45422951.pdf?src-supplier=Digi-Key, ComponentLink4URL=https://datasheet.ciiva.com/45422/ms5607-02ba03-45422951.pdf?src-supplier=Digi-Key, Manufacturer Part Number=MS560702BA03-50, Number of Pins=8, Pressure Type=Barometric, Reach SVHC Compliant=No, RoHS=Yes, RoHS Compliant=Yes, Stock 1=4561, Supplier 1="Utmel Electronic"
U400: "IC REG LDO 5V 0.5A DPAK", Case/Package=TO-252, Dropout Voltage=2V, Manufacturer=STMicroelectronics, Max Operating Temperature=150°C, Max Output Current=500mA, Max Output Voltage=5V, Max Input Voltage=35V, Min Operating Temperature=0°C, Min Input Voltage=7V, Package Quantity=2500, Power Supply Rejection Ratio (PSRR)=62dB, Quiescent Current=6mA, Tolerance=5%, Category="Voltage Regulators - Linear", ComponentLink1Description=https://datasheet.ciiva.com/34303/2021024-34303902.pdf?src-supplier=Jameco, ComponentLink1URL=https://datasheet.ciiva.com/34303/2021024-34303902.pdf?src-supplier=Jameco, ComponentLink2Description=https://datasheet.ciiva.com/4882/cd00000447-93067-4882369.pdf?src-supplier=Mouser, ComponentLink2URL=https://datasheet.ciiva.com/4882/cd00000447-93067-4882369.pdf?src-supplier=Mouser, ComponentLink3Description=https://datasheet.ciiva.com/15111/getdatasheetpartid-111001-15111751.pdf?src-supplier=Verical, ComponentLink3URL=https://datasheet.ciiva.com/15111/getdatasheetpartid-111001-15111751.pdf?src-supplier=Verical, ComponentLink4Description=https://datasheet.ciiva.com/1512/1834365-1512349.pdf?src-supplier=Element14, ComponentLink4URL=https://datasheet.ciiva.com/1512/1834365-1512349.pdf?src-supplier=Element14, ComponentLink5Description=https://datasheet.ciiva.com/14111/tbl78mxxc-data-e-14111354.pdf?src-supplier=Distrelec, ComponentLink5URL=https://datasheet.ciiva.com/14111/tbl78mxxc-data-e-14111354.pdf?src-supplier=Distrelec, ComponentLink6Description=https://datasheet.ciiva.com/46425/1834365-46425535.pdf?src-supplier=Element14, ComponentLink6URL=https://datasheet.ciiva.com/46425/1834365-46425535.pdf?src-supplier=Element14, ComponentLink7Description=https://datasheet.ciiva.com/2041/cd00000447-2041991.pdf?src-supplier=Digi-Key, ComponentLink7URL=https://datasheet.ciiva.com/2041/cd00000447-2041991.pdf?src-supplier=Digi-Key, ComponentLink8Description=https://datasheet.ciiva.com/2041/cd00000447-2041990.pdf?src-supplier=Digi-Key, ComponentLink8URL=https://datasheet.ciiva.com/2041/cd00000447-2041990.pdf?src-supplier=Digi-Key, ComponentLink9Description=https://datasheet.ciiva.com/2041/cd00000447-2041992.pdf?src-supplier=Digi-Key, ComponentLink9URL=https://datasheet.ciiva.com/2041/cd00000447-2041992.pdf?src-supplier=Digi-Key, ComponentLink10Description=https://datasheet.ciiva.com/16443/cd00000447-16443381.pdf?src-supplier=Future+Electronics, ComponentLink10URL=https://datasheet.ciiva.com/16443/cd00000447-16443381.pdf?src-supplier=Future+Electronics, ComponentLink11Description=https://datasheet.ciiva.com/41439/001184659-da-01-en-ic-reg-ldo-5v-l78m05cdt-tr-to-252-3-stm-41439772.pdf?src-supplier=Conrad, ComponentLink11URL=https://datasheet.ciiva.com/41439/001184659-da-01-en-ic-reg-ldo-5v-l78m05cdt-tr-to-252-3-stm-41439772.pdf?src-supplier=Conrad, Height=2.4mm, Lead Free="Lead Free", Length=6.6mm, Manufacturer Part Number=L78M05CDT-TR, Min Output Voltage=5V, Mount="Surface Mount", Nominal Output Voltage=5V, Number of Outputs=1, Number of Pins=3, Number of Regulators=1, Output Configuration=Positive, Output Current=500mA, Output Type=Fixed, Output Voltage=5V, Packaging="Tape and Reel", Polarity=Positive, Pricing 1="1=0,72, 10=0,629, 50=0,629, 100=0,482, 1000=0,305, 10000=0,277 (USD)", Radiation Hardening=No, Reach SVHC Compliant=No, RoHS=Yes, RoHS Compliant=Yes, Series=-, Stock 1=74380, Supplier 1=Mouser, Width=6.2mm
U401: "Linear Voltage Regulator IC Positive Fixed 1 Output 3.3V 150mA SOT-23-5", Case/Package=SOT-23, Dropout Voltage=165mV, Manufacturer=Microchip, Max Operating Temperature=125°C, Max Output Current=150mA, Max Output Voltage=3.3V, Max Supply Voltage=16V, Min Operating Temperature=-40°C, Min Supply Voltage=2.5V, Output Voltage Accuracy=1%, Power Supply Rejection Ratio (PSRR)=75dB, Accuracy=1%, Category="Voltage Regulators - Linear", Height=1.1mm, Lead Free="Lead Free", Length=2.9mm, Manufacturer Part Number=MIC5205-3.3YM5-TR, Max Input Voltage=16V, Min Input Voltage=2.5V, Mount="Surface Mount", Nominal Output Voltage=3.3V, Number of Outputs=1, Number of Pins=5, Number of Regulators=1, Output Current=150mA, Output Type=Fixed, Output Voltage=3.3V, Packaging="Tape and Reel", Polarity=Positive, Pricing 1="1=0,5386, 10=0,5334, 25=0,4417, 50=0,4373, 100=0,395, 250=0,3909, 500=0,3869, 1000=0,3827, 3000=0,3677 (USD)", Radiation Hardening=No, Reach SVHC Compliant=No, RoHS=Yes, RoHS Compliant=Yes, Series=-, Stock 1=2538, Supplier 1="Arrow Electronics", Termination=SMD/SMT, Width=1.6mm
X200: "Crystal 16MHz ±10ppm (Tol) ±10ppm (Stability) 8pF FUND 80Ohm 4-Pin Ultra Mini-CSMD T/R", Manufacturer=Epson, Category=Crystals, ComponentLink1Description=https://support.epson.biz/td/api/doc_check.php?dl=brief_FA-20H&amp;lang=en&src-supplier=Digi-Key, ComponentLink1URL=https://support.epson.biz/td/api/doc_check.php?dl=brief_FA-20H&amp;lang=en&src-supplier=Digi-Key, ComponentLink2Description=https://www5.epsondevice.com/en/information/support/pdf/june_2018_psc_masterbook.pdf?src-supplier=Digi-Key, ComponentLink2URL=https://www5.epsondevice.com/en/information/support/pdf/june_2018_psc_masterbook.pdf?src-supplier=Digi-Key, ComponentLink3Description=https://www.eea.epson.com/wp-content/uploads/2016/11/November-2016-PCS-MASTER-BOOK.pdf?src-supplier=Digi-Key, ComponentLink3URL=https://www.eea.epson.com/wp-content/uploads/2016/11/November-2016-PCS-MASTER-BOOK.pdf?src-supplier=Digi-Key, Manufacturer Part Number="FA-20H 16.0000MF10Z-AJ0", Pricing 1="1=0,73, 10=0,606, 50=0,5454, 100=0,4848, 500=0,46056 (USD)", RoHS=Yes, Stock 1=229665, Supplier 1=Digi-Key

## Free pads (board coordinates)
  round 4.5 hole 3: ""(3.7,3.7) ""(3.7,46.1) ""(76.1,3.7) ""(76.1,46.1)

## Via types
v1: diameter 0.9, hole 0.4, Top Layer to Bottom Layer, tented both sides, 160 vias
v2: diameter 0.7, hole 0.3, Top Layer to Bottom Layer, tented both sides, 55 vias
v3: diameter 0.6, hole 0.3, Top Layer to Bottom Layer, tented both sides, 17 vias
v4: diameter 0.9, hole 0.4, Top Layer to Bottom Layer, 4 vias

## Nets (pads, with @x,y where several pads share a name; then routed paths per layer and width w, separated by ;. In a path a pad name is that pad's centre, name@x,y a point inside that pad or via, vN(x,y) a via of type N, cw(c..) or ccw(c..) an arc to the next point about the centre after c; other vN are vias at no path point)
3V3: C200.2 C201.2 C202.2 C203.2 C204.2 C205.2 C300.1 C301.2 C302.2 C303.2 C404.2 C405.2 D401.A FB200.1 J200.1 J202.4 J300.4 J301.6 R205.2 R206.2 R207.2 R300.2 U200.1 U200.19 U200.32 U200.48 U200.64 U300.3 U300.7 U300.8 U301.3 U301.7 U301.11 U301.14 U302.1 U302.2 U302.4 U302.5 U401.5 | length 280.2
  Top Layer w0.25: 26.9,28.4 U200.1 ; 29.8,31.8 29.8,31.3 29.915,31.185 29.915,30.345 U200.64 ; 30.321,17.521 30.915,18.115 30.915,18.955 U200.19 30.92,18.98 30.92,19.9 ; U200.32 38.13,18.97 38.3,18.8 ; 37.5,39.7 37.8,39.4 U301.11 39.054,39.4 39.2,39.254 39.2,39.25 40.05,38.4 U301.7 ; U301.14 39.254,40.9 39.754,40.4 41.235,40.4 41.285,40.35 ; U200.48 40.5,28.4
  Top Layer w0.3: U302.2@25.184,41.184 U302.2 ; 30.92,19.9 30.92,20.112 31.1,20.292 v2(31.1,20.4)
  Top Layer w0.4: U302.5 22.7,40 ; U302.4 22.7,40 ; U302.2@25.184,41.184 25.184,40.284 24.9,40 22.7,40 ; 26.7,29.5 26.7,28.6 26.9,28.4 ; C303.2@28.5,40.35 C303.2 C303.2@28.65,40.3 ; C200.2 30.2,17.4 30.321,17.521 ; C301.2@36.75,39.7 C301.2 C301.2@36.85,39.7 ; 38.3,18.8 38.8,18.3 ; 40.5,28.4 40.9,28.8 41.1,28.8 ; 41.286,40.35 41.719,39.917 42.333,39.917 C302.2 ; U300.7 43.24,9 44.2,9 44.5,9.3 44.5,10.277 ; U300.8@43.205,10.277 44.5,10.277 ; C300.1@45.372,10.277 44.5,10.277 ; C300.1 C300.1@45.525,10.275 ; v2@46.575,10.275 v2(46.6,10.3) ; v4(60.8,23.8) 60.836,23.764 61.449,23.764 62.613,22.6 69.2,22.6 73.05,26.45 D401.A
  Top Layer w0.5: U302.2 U302.1 27.2,41.2 28.2,41.2 28.5,40.9 C303.2@28.5,40.35 ; v2(34.498,7.42) 34.552,7.42 34.857,7.725 35.955,7.725 U300.3 ; C301.2@36.85,39.7 37.5,39.7
  Top Layer w0.6: C204.2 25.686,29.714 26.486,29.714 26.7,29.5 ; v2(25.6,30.9) v2@25.619,30.919 ; C205.2 C203.2 29.8,31.8 ; C303.2@28.65,40.3 v2(29.7,40.3) ; v2(32.7,8.9) 32.727,8.9 32.777,8.95 33.7,8.95 R300.2 ; R205.2 35.15,44.55 36.29,45.69 J202.4 ; v2(35.719,39.781) 36.669,39.781 C301.2@36.75,39.7 ; R207.2 R206.2 36.75,33.203 36.85,33.103 37.57,33.103 37.773,32.9 v2(37.8,32.9) ; 38.8,18.3 39.5,17.6 C201.2 39.512,16.613 40.587,16.613 v2(40.6,16.625) ; 41.1,28.8 C202.2 v2(42.2,27.7) ; C302.2 42.531,39.719 43.581,39.719 v2(43.6,39.7) ; C300.1@45.525,10.275 v2@46.575,10.275 ; C405.2 57.1,24.243 57.1,25.5 57.5,25.9 58.105,25.9 U401.5@58.15,25.945 ; U401.5 U401.5@58.15,25.945 ; C404.2@59.321,23.821 C404.2 59,24.143 59,25.548 58.649,25.9 58.195,25.9 U401.5@58.15,25.945
  Top Layer w0.75: v2(21,19.4) FB200.1 ; C204.2 v2(25.6,30.9) ; v2(27.8,31.7) C205.2 ; R205.2 v1(33.8,45.8) ; C405.2@56.657,23.8 C405.2 ; v4@60.778,23.821 v4(60.8,23.8)
  Top Layer w0.9: v4(55.2,23.8) C405.2@56.657,23.8 ; C404.2@59.321,23.821 v4@60.778,23.821
  Bottom Layer w0.6: v2(25.6,30.9) v2@25.627,30.9 ; J301.6 J301.6@35.962,2.642
  Bottom Layer w0.75: J200.1 19.2,44.951 19.551,44.6 23.7,44.6 ; v2(21,19.4) 21,20.3 22.1,21.4 31.1,21.4 ; J300.4 23.7,44.6 ; v2@25.627,30.9 26.027,30.5 27.8,30.5 ; v2(27.8,31.7) 27.8,30.5 ; v2(29.7,40.3) 29.7,44.6 ; v2(31.1,20.4) 31.1,21.4 ; v2(32.7,8.9) 32.7,7.4 ; v1(33.8,45.8) 33.8,44.6 ; v2@34.478,7.4 32.7,7.4 ; v2(35.719,39.781) 35.719,44.6 ; J301.6@35.962,2.642 35.962,4.9 ; v2(37.8,32.9) 37.8,32.539 38.539,31.8 45.2,31.8 ; v2(40.6,16.625) 40.6,21.4 ; v2(42.2,27.7) 48.3,27.7 52.2,23.8 ; v2(43.6,39.7) 45.2,39.7 ; v2(46.6,10.3) 48.2,10.3 ; v4(55.2,23.8) 52.2,23.8 ; v4(60.8,23.8) 59.8,23.8 51.8,31.8 45.2,31.8 ; 23.7,44.6 29.7,44.6 ; 27.8,30.5 27.8,29.2 31.1,25.9 31.1,21.4 ; 29.7,44.6 33.8,44.6 ; 31.1,21.4 40.6,21.4 ; 32.7,7.4 32.7,6.1 33.9,4.9 35.962,4.9 ; 33.8,44.6 35.719,44.6 ; 35.719,44.6 42.6,44.6 45.2,42 45.2,39.7 ; 35.962,4.9 47.4,4.9 48.2,5.7 48.2,10.3 ; 40.6,21.4 48.2,21.4 ; 45.2,31.8 45.2,39.7 ; 48.2,10.3 48.2,21.4 ; 48.2,21.4 49.8,21.4 52.2,23.8
5V: C212.1 C401.2 C402.2 FB201.1 U400.3 U401.1 U401.3 | length 25.7
  Top Layer w0.6: FB201.1@55.3,41 FB201.1 ; 56.025,29.975 56.205,29.795 56.205,28.845 U401.3 U401.3@56.295,28.845 ; 57.652,30 58.105,29.547 58.105,28.845 U401.1
  Top Layer w0.75: 55.3,30.7 56.025,29.975 57.575,29.975 ; FB201.1 C212.1
  Top Layer w0.9: U400.3@62.52,33.743 62.72,33.543 U400.3
  Top Layer w1: 55.3,30.7 55.3,33.743 ; FB201.1@55.3,41 55.3,33.743 ; U400.3@62.52,33.743 C401.2 C402.2 55.3,33.743
Beeper: U200.34 U201.2 | length 19.9
  Top Layer w0.25: U200.34 39.375,21.385 40.315,21.385 41.2,20.5 45,20.5 52,13.5 U201.2@56.033,13.5
BOOT0: R200.2 U200.60 | length 2.4
  Top Layer w0.25: R200.2 31.8,31.5 31.93,31.37 U200.60
DP1-R: R202.2 U200.35 | length 3
  Top Layer w0.25: U200.35 40.7,21.9
  Top Layer w0.4: 40.7,21.9 41.1,22.3
  Top Layer w0.6: 41.1,22.3 R202.2
DP2-R: R203.1 U200.36 | length 4.2
  Top Layer w0.25: U200.36 39.375,22.415 40.077,22.415 40.097,22.435 40.234,22.435 40.6,22.801 40.6,23.1
  Top Layer w0.4: 40.6,23.1 40.6,23.56 40.64,23.6
  Top Layer w0.6: 40.64,23.6 40.64,23.64 41.364,24.364 42.1,24.364 42.2,24.464 R203.1@42.2,24.5
GND: C200.1 C201.1 C202.1 C203.1 C204.1 C205.1 C206.1 C207.1 C208.1 C209.1 C210.1 C211.1 C212.2 C213.2 C300.2 C301.1 C302.1 C303.1 C400.1 C401.1 C402.1 C403.1 C404.1 C405.1 D400.1 J200.2 J201.5 J202.2 J300.2 J301.1 J302.2 J303.2 J402.2 pad. Q400.1 Q400.3 Q401.1 Q401.3 R200.1 R204.2 R205.1 R400.2 R402.1 R404.1 S200.3 U200.12 U200.18 U200.31 U200.47 U200.63 U201.1 U300.4 U301.2 U301.4 U301.6 U301.10 U301.15 U302.3 U400.2 U401.2 X200.2 X200.4 | length 89.1
  Top Layer w0.25: J200.2 16.66,39.74 20.9,35.5 31.554,35.5 31.8,35.254 R200.1 ; U200.12 v2(29.4,22.9) ; v2(30.4,28.9) 30.415,28.915 30.415,30.315 U200.63 ; v2(36.9,20.375) 36.915,20.36 36.915,18.985 U200.31 ; v2(37.3,41.4) U301.15 ; 37.6,38.56 37.94,38.9 38.2,38.9 U301.10 ; U200.47 39.375,27.885 40.315,27.885 40.5,27.7 ; U301.4 40.27,39.9 40.08,39.71 40.08,39.09 40.27,38.9 40.87,38.9 41.13,38.9 41.769,38.261 ; U301.2 41.878,40.9
  Top Layer w0.3: v2(30.075,20.375) 30.152,20.298 30.152,20.122 30.42,19.854 30.42,18.98 U200.18 ; C301.1 36.823,38.273 37.313,38.273 ; v1(51.3,44.4) 51.3,44.562 51.55,44.812 J201.5
  Top Layer w0.4: U302.3 23.975,41.225 23.975,42.375 v2(24,42.4) ; 40.5,27.7 v2(41.175,27.7) ; 41.878,40.9 42.019,40.9 42.319,41.2 v2(42.4,41.2)
  Top Layer w0.5: v2(34.499,6.375) 34.553,6.375 34.632,6.455 35.955,6.455 U300.4 ; 37.313,38.273 37.6,38.56 ; 41.769,38.261 C302.1@42.489,38.261
  Top Layer w0.6: Q401.3 12.585,34.365 12.585,35.685 v2(12.6,35.7) ; v2(15.1,35.7) 15.105,35.695 15.105,34.355 Q401.1 ; v2(17.3,26.8) 17.327,26.8 17.377,26.85 C210.1 ; v3(20.5,24.6) X200.2 ; X200.4 21.981,27.481 23.081,27.481 v2(23.1,27.5) ; C211.1 v2(22.1,30.9) ; v2(22.9,24.2) C209.1 ; v2(23,19.4) C206.1 ; C207.1 25.011,20.389 25.011,19.411 v2(25.022,19.4) ; v2(26.6,34.5) 26.627,34.5 26.827,34.3 27.7,34.3 C205.1 C203.1 ; C303.1 28.7,38.85 29.277,38.85 29.7,39.273 v2(29.7,39.275) ; v2(30.2,14) C200.1 ; v2(33.8,41.95) R205.1 ; v2(35.7,38.7) 35.727,38.7 36.077,38.35 36.7,38.35 C301.1 ; C302.1 42.6,38.35 43.248,38.35 43.573,38.675 v2(43.6,38.675) ; C300.2 45.6,8.85 46.199,8.85 v2(46.581,9.232) ; Q400.1 64.697,15.072 64.697,13.702 v2(64.7,13.7) ; v2(67.2,13.7) 67.2,13.727 67.235,13.762 Q400.3 ; v2@69.623,11.25 69.673,11.2 v2(69.7,11.2)
  Top Layer w0.75: v2(10.1,38.2) R404.1 ; C204.1 24.125,29.825 24.125,30.525 v2(24.5,30.9) ; C208.1 37.314,13.9 v2(38.7,13.9) ; C201.1 39.525,15.125 39.625,15.125 40.1,15.6 v2(40.6,15.6) ; v2(42.225,15.025) 42.225,16.175 R204.2 ; C202.1 43.725,28.825 v2(43.725,29.925) ; v1(59.1,39.8) C212.2 ; C213.2 v1(59.1,44.3) ; R402.1 v2@69.623,11.25 ; R400.2 v1(73.7,31)
  Top Layer w0.9: v2(5.6,16.2) 7.2,16.2 S200.3 ; v1(53.2,20.1) C403.1 ; v1(56.7,20.1) C405.1 ; v1(59.3,20.1) C404.1
  other v1: 53,3 54.5,3 56,3 57.5,3 59,3 60.5,3 62,3 63.5,3 65,3 66.5,3 68,3 61.25,4.5 62.75,4.5 64.25,4.5 65.75,4.5 67.25,4.5 68.75,4.5 63.5,6 65,6 66.5,6 68,6 64.25,7.5 65.75,7.5 67.25,7.5 68.75,7.5 2,9 5,9 6.5,9 8,9 9.5,9 63.5,9 65,9 2.75,10.5 4.25,10.5 5.75,10.5 7.25,10.5 8.75,10.5 10.25,10.5 2,12 3.5,12 5,12 6.5,12 8,12 9.5,12 11,12 12.5,12 14,12 15.5,12 2.75,13.5 11.75,13.5 13.25,13.5 14.75,13.5 16.25,13.5 17.75,13.5 3.5,22.5 5,22.5 6.5,22.5 8,22.5 9.5,22.5 11,22.5 12.5,22.5 14,22.5 4.25,24 5.75,24 7.25,24 8.75,24 10.25,24 11.75,24 13.25,24 14.75,24 9.5,25.5 11,25.5 12.5,25.5 14,25.5 60.9,25.9 68.9,25.9 76.4,26.4 50.75,27 52.25,27 59.6,27.4 60.9,27.4 68.9,27.4 77.4,27.4 76.4,28.4 50,28.5 51.5,28.5 53,28.5 59.6,28.9 60.9,28.9 68.9,28.9 77.4,29.4 50.75,30 68.9,30.4 76.4,30.4 77.4,31.4 47,33 48.5,33 73.9,33.4 75.4,33.4 77.4,33.4 47.75,34.5 49.25,34.5 50.75,34.5 73.9,34.9 75.4,34.9 77.4,35.4 47,36 48.5,36 50,36 51.5,36 57.4,36.4 59.4,36.4 58.4,37.4 77.4,37.4 49.25,37.5 50.75,37.5 57.4,38.4 59.4,38.4 50,39 51.5,39 77.4,39.3 49.25,40.5 50.75,40.5 77.4,40.9 64.9,41.9 66.9,41.9 68.9,41.9 70.9,41.9 74.4,41.9 76.4,41.9 11,42 12.5,42 48.5,42 65.9,42.9 67.9,42.9 69.9,42.9 75.4,42.9 77.4,42.9 8.75,43.5 10.25,43.5 11.75,43.5 13.25,43.5 14.75,43.5 9.5,45 11,45 12.5,45 10.25,46.5 11.75,46.5 33.8,47 9.5,48 11,48 12.5,48
  other v2: 32.655,9.955 21,18.3 45.7,24.3 28.825,31.7 38.9,32.9 15,39.2
  other v3: 40.8,6.5 38.4,9 33.4,15.7 35,15.7 34.2,32.4 40.5,37.1 27.3,37.6 32.4,42
  other v4: 55.2,22.6 60.8,22.6
HSE-IN: C211.2 U200.5 X200.1 | length 11
  Top Layer w0.25: X200.1 20.6,27.5 20.6,28.6 ; C211.2 20.6,28.6 ; U200.5 27.995,26.405 27.095,26.405 26.895,26.605 26.895,27.105 25.4,28.6 20.6,28.6
HSE-OUT: R201.2 U200.6 | length 2.6
  Top Layer w0.25: R201.2 26.442,26.2 26.742,25.9 U200.6
HSE-OUT-R: C210.2 R201.1 X200.3 | length 8.7
  Top Layer w0.25: C210.2@18.552,25.35 18.468,25.266 18.468,24.232 18.9,23.8 21.4,23.8 21.9,24.3 X200.3 22.8,25.7 23.3,26.2 R201.1
I2C1-SCL: J300.1 R206.1 U200.58 U301.8 U302.8 | length 37.7
  Top Layer w0.25: v3(26.4,37.6) 26.425,37.625 26.425,38.775 U302.8 ; U200.58 32.945,30.345 32.945,31.245 33.3,31.6 34.5,31.6 35.25,32.35 R206.1 ; v3(39.507,37.112) 39.521,37.126 39.521,37.971 U301.8
  Top Layer w0.4: J300.1 31.5,47.22 v3(31.5,42) ; v3(34.2,33.3) R206.1
  Bottom Layer w0.25: v3(26.4,37.6) 26.4,36.6 26.9,36.1 32.5,36.1 ; v3(31.5,42) 31.5,41 32.5,40 32.5,36.1 ; v3(34.2,33.3) 34.2,34.3 ; v3(39.507,37.112) 39.507,36.443 37.364,34.3 34.2,34.3 ; 32.5,36.1 32.5,35.2 33.4,34.3 34.2,34.3
I2C1-SDA: J300.3 R207.1 U200.59 U301.9 U302.7 | length 37.6
  Top Layer w0.25: U302.7 25.2,37 25.5,36.7 30.9,36.7 ; J300.3 26.24,45.56 30.9,40.9 30.9,36.7 ; U200.59 32.43,31.53 33.3,32.4 33.3,34.9 33.7,35.3 R207.1 35.25,36.7 ; U301.9 38.37,37.17 37.9,36.7 35.25,36.7 ; 30.9,36.7 35.25,36.7
INPUT: F400.1 J402.1 | length 7.9
  Top Layer w1: J402.1@63.4,44.702 J402.1@63.4,45
  Top Layer w1.5: F400.1 62.6,43.902 J402.1@63.4,44.702
LED: D200.A U200.33 | length 4.2
  Top Layer w0.25: 39.36,20.44 U200.33
  Top Layer w0.4: 39.36,20.44 40,19.8
  Top Layer w0.6: 40,19.8 41.2,18.6 D200.A
LED-K: D200.K R204.1 | length 2.6
  Top Layer w0.6: R204.1 43.85,16.3 43.85,17.15 44.064,17.364 44.064,18.414 D200.K
MISO: J301.4 U200.22 U300.2 | length 22.5
  Top Layer w0.25: U200.22 32.43,17.57 v3(33.4,16.6) ; U300.2 36.004,9.026 37.445,9.026 v3(37.454,9.018) 37.454,7.646 41,4.1 J301.4
  Bottom Layer w0.25: v3(33.4,16.6) 32.8,16.6 32.5,16.3 32.5,14.4 37.368,9.532 37.368,9.104 v3(37.454,9.018)
MOSI: J301.3 U200.23 U300.5 | length 23.8
  Top Layer w0.25: U200.23 32.945,18.955 32.945,18.253 32.965,18.233 32.965,18.096 33.261,17.8 34.577,17.8 35,17.377 v3@35,16.7 ; v3(41.795,6.495) U300.5 ; v3@41.795,6.617 41.795,5.605 43.54,3.86 J301.3
  Bottom Layer w0.25: v3@35,16.7 34.914,16.614 34.516,16.614 34.2,16.298 34.2,14.5 41.637,7.063 41.637,6.774 v3@41.795,6.617
  other v3: 35,16.6
NetC213_1: C213.1 FB201.2 J201.1 | length 5.9
  Top Layer w0.4: J201.1 54.175,45.815 54.175,45.183 54.175,44.893
  Top Layer w0.6: 54.175,44.893 54.521,44.546 55.054,44.546 55.4,44.2
  Top Layer w0.75: 55.4,44.2 FB201.2 C213.1
NetC400_2: C400.2 D400.2 F400.2 U400.1 | length 10.6
  Top Layer w1: F400.2 F400.2@66.562,37.537 ; D400.2@69.837,37.537 D400.2
  Top Layer w1.2: U400.1 67.28,33.85 U400.1@67.33,33.9 ; D400.2 70.1,37.4 C400.2
  Top Layer w1.3: U400.1@67.33,33.9 C400.2
  Top Layer w1.5: F400.2@66.562,37.537 D400.2@69.837,37.537
NetC403_2: C403.2 U401.4 | length 4.8
  Top Layer w0.6: C403.2 53.2,25.1 54.3,26.2 U401.4
NetD401_K: D401.K R400.1 | length 2.3
  Top Layer w0.6: R400.1 71.1,30.95 71.1,28.75 D401.K
NetJ400_1: J400.1 Q400.5 Q400.6 Q400.7 Q400.8 | length 10.7
  Top Layer w1: Q400.8 Q400.7 Q400.6 Q400.5 68.505,20.638 68.53,20.663 75.062,20.663 J400.1
NetJ400_2: J400.2 J400.3 | length 5
  Top Layer w1: J400.3 J400.2
NetJ401_1: J401.1 Q401.5 Q401.6 Q401.7 Q401.8 | length 10.6
  Top Layer w0.9: J401.1 4.65,28.95 11.275,28.95 11.3,28.925 Q401.5 Q401.6 Q401.7 Q401.8
NetJ401_2: J401.2 J401.3 | length 5
  Top Layer w1: J401.2 J401.3
NetQ400_2: Q400.2 Q400.4 R401.2 R402.2 | length 9
  Top Layer w0.6: Q400.2 66.065,15.175 66.065,15.849 66.516,16.3 68.054,16.3 68.405,15.949 68.405,15.175 Q400.4 ; R401.2@65.982,12.818 Q400.2@65.982,15.058 ; R402.2@68.502,12.753 Q400.4@68.502,15.072
NetQ401_2: Q401.2 Q401.4 R403.2 R404.2 | length 9.2
  Top Layer w0.6: R404.2 Q401.4 11.4,34.25 11.4,33.451 11.751,33.1 13.389,33.1 13.74,33.451 13.74,34.25 Q401.2 13.82,34.37 13.82,36.68 R403.2
NetR202_1: R202.1 R401.1 | length 26.9
  Top Layer w0.5: R202.1 47.8,22.3 51.9,18.2 58.6,18.2 65.35,11.45 65.85,11.45 R401.1
NetR203_2: R203.2 R403.1 | length 39.8
  Top Layer w0.6: R403.1 v2(15,38.2) ; R203.2 v2(44.7,24.3)
  Bottom Layer w0.5: v2(15,38.2) 15.019,38.181 15.819,38.181 20.534,33.466 30.307,33.466 30.6,33.173 30.6,30.2 35.3,25.5 44.2,25.5 44.7,25 v2(44.7,24.3)
NRST: C209.2 S200.2 U200.7 | length 15
  Top Layer w0.25: S200.2 16.479,20.779 16.479,21.579 18.1,23.2 25.404,23.2 25.55,23.346 C209.2 26.5,24.2 26.7,24.4 26.7,25.1 27,25.4 U200.7
SCK: J301.2 U200.21 U300.6 | length 24.9
  Top Layer w0.25: U200.21 31.945,18.955 31.945,18.253 31.965,18.233 31.965,15.735 35.7,12 37.811,12 42.046,7.765 U300.6 43.209,7.761 44.439,7.761 46.08,6.12 J301.2
SS: J301.5 R300.1 U200.20 U300.1 | length 26.8
  Top Layer w0.25: U200.20 31.43,10.744 ; R300.1 33.606,10.744 31.43,10.744 ; R300.1@33.855,10.305 U300.1 ; J301.5 38.46,4.04 38.1,4.4 33.1,4.4 31.43,6.07 31.43,10.744
SWCLK: J202.3 U200.49 | length 25.3
  Top Layer w0.25: U200.49 37.43,30.384 37.445,30.399 37.799,30.399 45.9,38.5 45.9,43.1 43.7,45.3 40.93,45.3 J202.3
SWDIO: J202.1 U200.46 | length 26.8
  Top Layer w0.25: U200.46 39.345,27.415 38.085,27.415 37.904,27.596 37.904,28.504 47.5,38.1 47.5,43.81 J202.1
UART4-RX: J302.1 U200.15 | length 21.8
  Top Layer w0.23: J302.1 16.6,6.3 26.9,16.6 26.9,21.22 27.08,21.4 U200.15
UART4-TX: J302.3 U200.14 | length 24.6
  Top Layer w0.23: J302.3 26.1,19.375 26.1,21.4 26.6,21.9 U200.14
USART2-RX: J303.1 U200.17 | length 15.1
  Top Layer w0.25: J303.1 28.9,5.2 28.9,18.824 29.046,18.97 U200.17